# Altium PCB PCB1.PcbDoc (part 2 of 4)
Units mil, origin at the board's own origin, x right, y up, seen from the top; angles counter-clockwise.
Board outline 3904 x 3805 mil, 4 copper layers (Top Layer, Layer 2, Layer 3, Bottom Layer), stack 23.756 mil thick; 231 components, 342 nets, 1187 pads, 543 vias.
Unrouted connection lines stored in the file: 4.
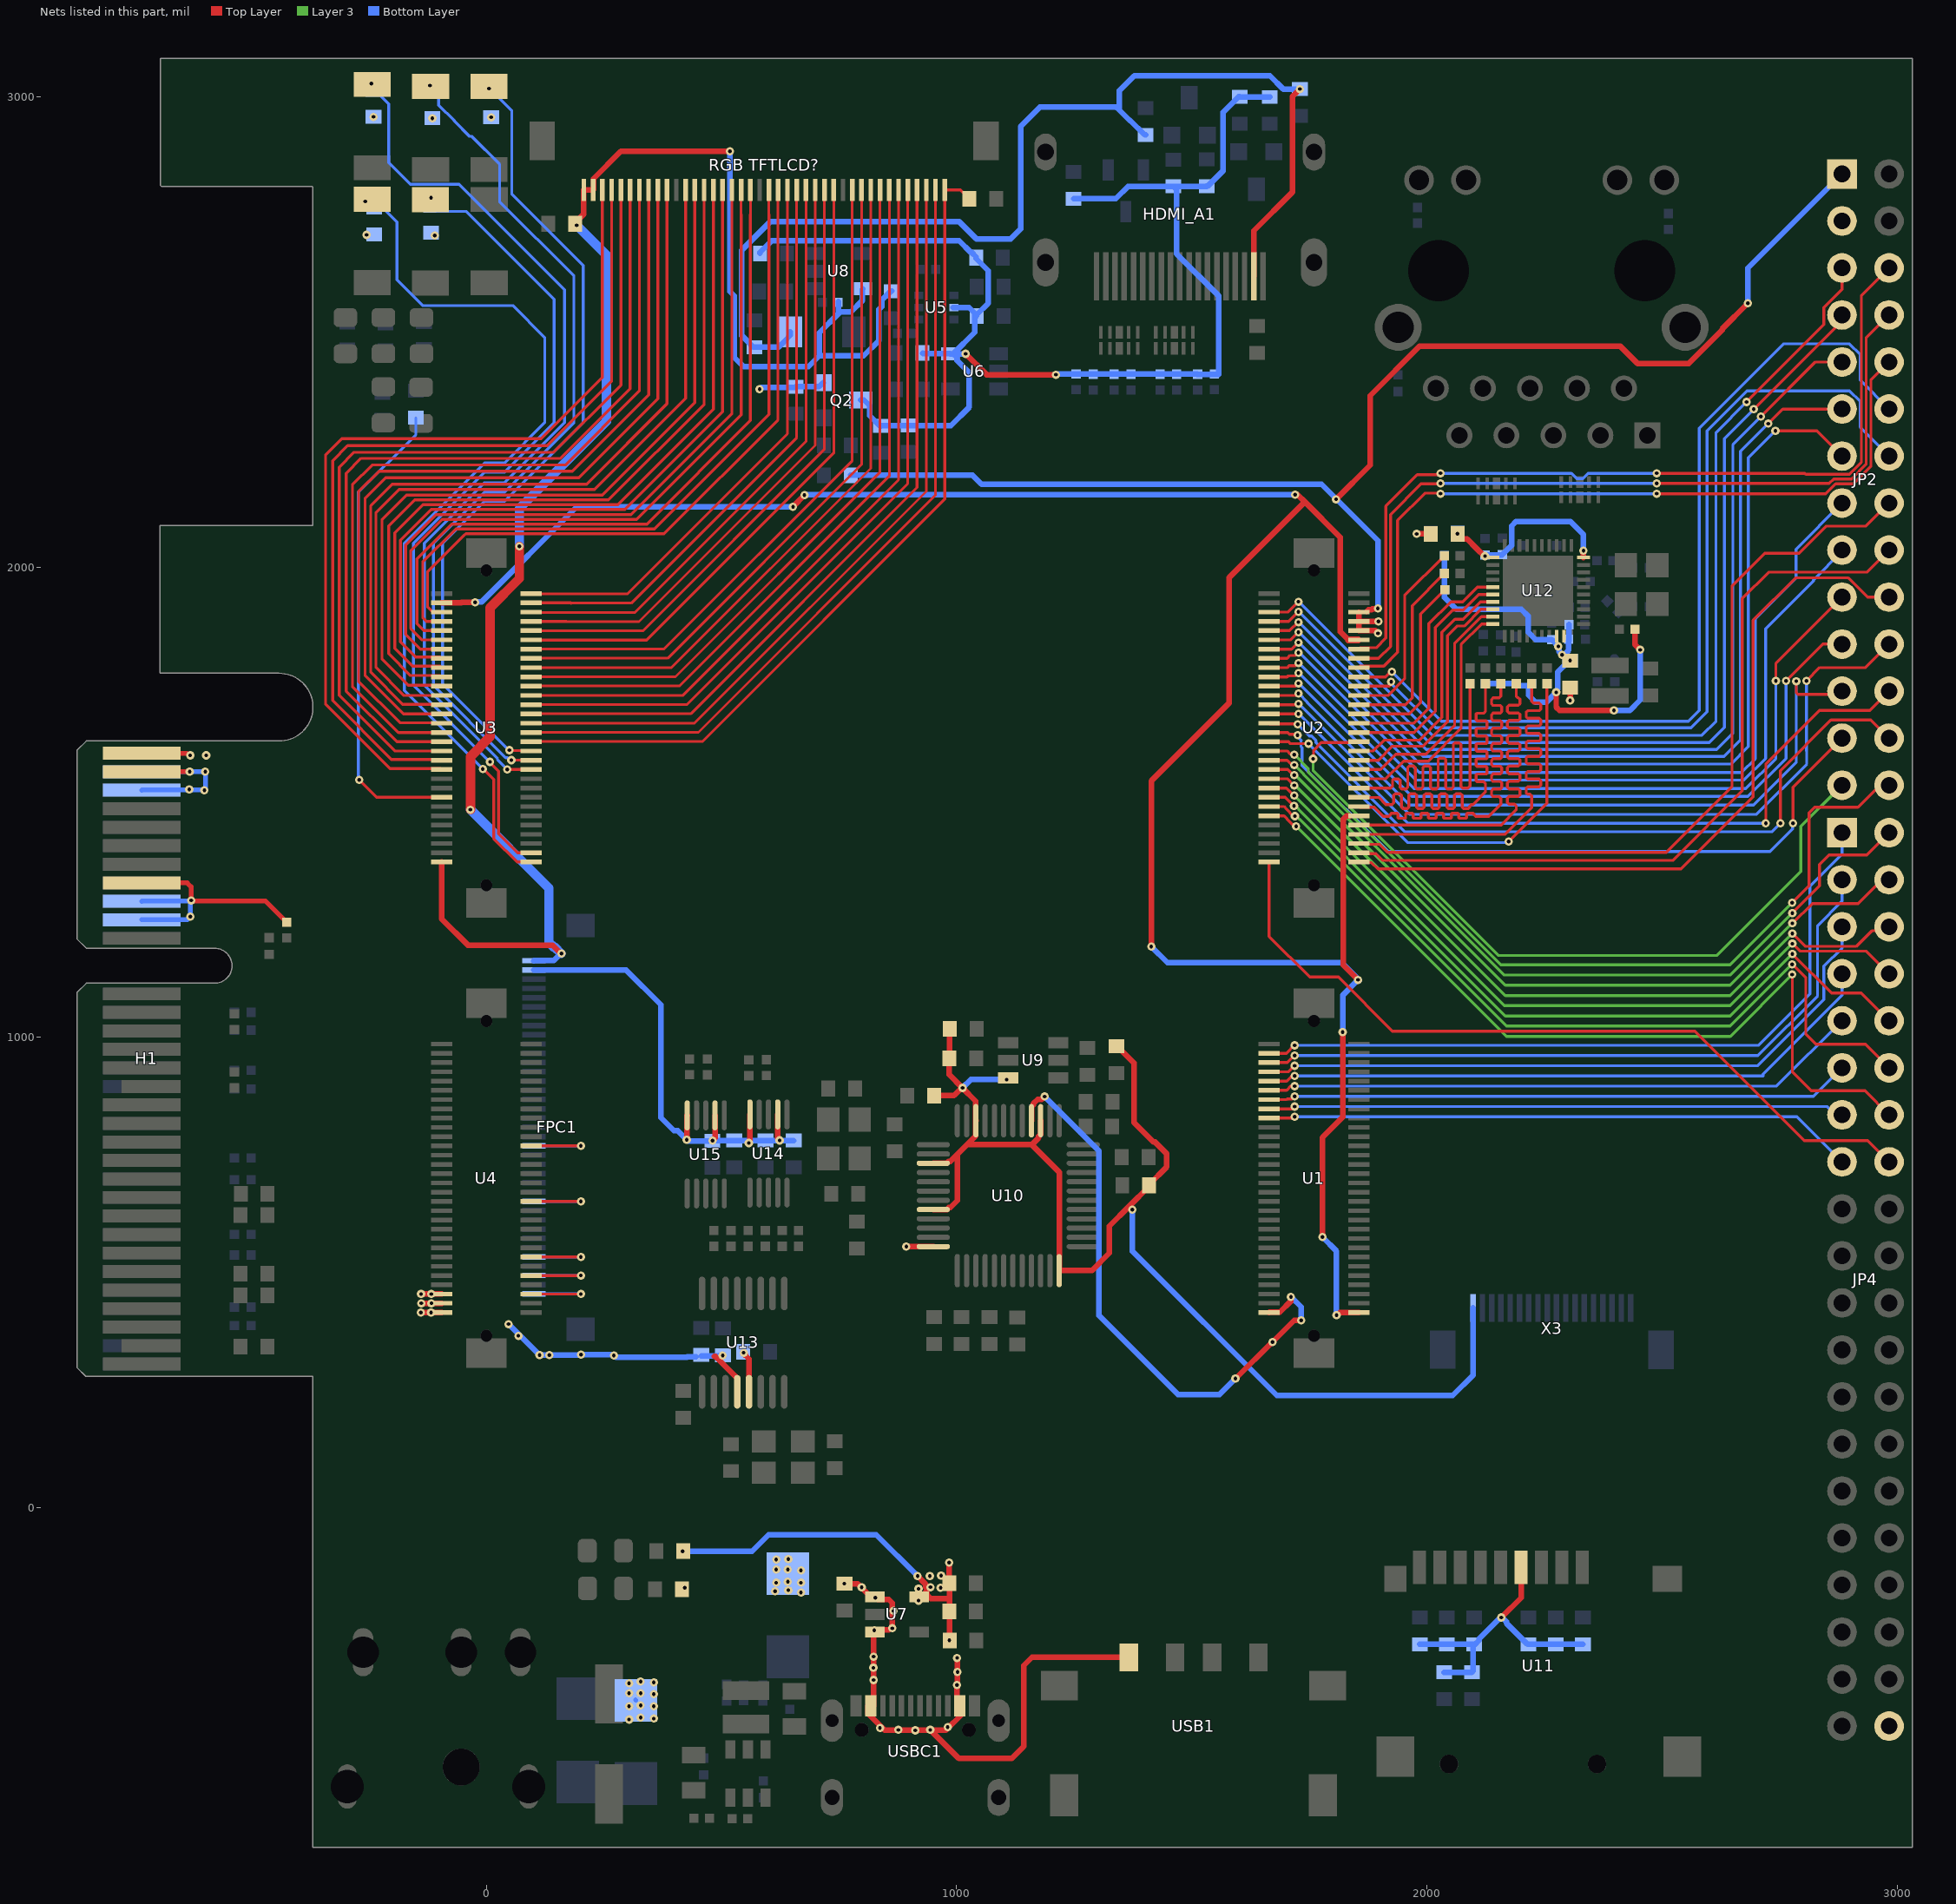
[diagram p4: the nets of this part, all layers, seen from the top]

## Via types
v1: diameter 17.7, hole 7.9, Top Layer to Bottom Layer, tented both sides, 543 vias

## Nets (pads, with @x,y where several pads share a name; then routed paths per layer and width w, separated by ;. In a path a pad name is that pad's centre, name@x,y a point inside that pad or via, vN(x,y) a via of type N, cw(c..) or ccw(c..) an arc to the next point about the centre after c; other vN are vias at no path point) (continued)
3V3_PCIE: H1.A9 H1.A10 H1.B8 R84.2 | length 605.5
  Top Layer w10: H1.B8@-733,1328.43 -636.43,1328.43 -628,1320 v1(-628,1291) -627,1290 -470.27,1290 R84.2@-425,1244.73
  Bottom Layer w10: H1.A10@-733,1249.68 -636.32,1249.68 v1(-629.47,1256.53) -629.47,1289.53 v1(-628,1291) ; H1.A9@-733,1289.06 -732.03,1290.03 v1@-628.97,1290.03
12V_PCIE: D6.1 H1.A2 H1.A3 H1.B1 H1.B2 | length 515.7
  Top Layer w10: H1.B2@-733,1564.65 -732.82,1564.82 -631.18,1564.82 v1(-631,1565) ; H1.B1@-733,1604.02 -636.56,1604.01 -632.08,1599.53 v1(-630,1599.53)
  Bottom Layer w10: H1.A3@-733,1525.28 -732.14,1526.14 -632.86,1526.14 v1(-632,1527) -631,1526 -598.86,1526 v1@-597.34,1527.52 ; H1.A2@-733,1564.65 -732.82,1564.82 -631.18,1564.82 v1(-631,1565) -602.86,1565 -597,1559.14 v1@-597,1527.86 ; D6.1@317,-409 D6.1@318,-410
  other v1: 303.38,-451 356,-449 328,-447 303.38,-423 356,-423 328,-421 356,-397 303.38,-395 328,-395 303.38,-374 356,-372 328,-370 -599.86,1525 -598,1565 -596,1599.53
+3.3: U1.2 U2.12 U2.50 U3.57 | length 5047
  Top Layer w12: U3.57@-95.46,1923.74 -53.9,1923.74 -52.64,1925 v1(-24,1925) ; v1(652,2128) 652,2128.51 v1(676.3,2152.81) ; v1(1414,1193) 1414,1545 1580,1711 1580,1978 1740.5,2138.5 ; v1(1720,2154) 1725,2154 1740.5,2138.5 ; v1(1778,575) 1778,786.86 1821,829.86 v1(1821,1011) ; v1(1808,409) 1809.54,409 1815.1,414.56 U1.2@1855.47,414.56 ; 1832.38,1843.92 1854.39,1843.92 U2.50@1855.47,1845 1854.39,1846.08 1832.38,1846.08 1816,1862.45 1816,2063 1740.5,2138.5 ; U2.12@1836.31,1471 1829.86,1471 1822.83,1463.97 1822.83,1153.17 v1(1854,1122)
  Bottom Layer w12: v1(-24,1925) -23.51,1925.49 -10.51,1925.49 192,2128 v1(652,2128) ; v1(676.3,2152.81) 677.49,2154 v1(1720,2154) ; v1(1414,1193) 1448.5,1158.5 1819.5,1158.5 1852.91,1125.09 1852.91,1124.63 1856.54,1121 v1@1856.63,1121 ; v1(1778,575) 1808,545 v1(1808,409) ; v1(1821,1011) 1821,1089 v1(1854,1122)
+3.3_AVDD_GMII: C46.2 C47.2 C48.2 FB7.1 U12.11 U12.40 | length 406.1
  Top Layer w12: v1(2065.34,2071) 2065.34,2068.92 2074.56,2059.7 2085.76,2059.7 2106.46,2039 2122.26,2023.2 v1(2123.8,2023.2) ; U12.40@2333.26,2020.3 v1(2333.26,2034.89)
  Bottom Layer w12: C48.2@2123.8,2025.43 v1(2123.8,2023.2) 2126.53,2025.93 2160.3,2025.93 C47.2@2160.8,2026.43 2180.64,2046.28 2180.64,2087.64 2190,2097 2305,2097 2333.26,2068.74 v1(2333.26,2034.89)
+3.3_board: C4.2 C5.2 C11.1 C15.2 C16.2 C21.2 C22.2 C25.1 C26.2 C27.2 C36.2 C37.2 FB6.2 FB7.2 FPC1.2 JP2.3 JP4.40 Q2.2 R14.2 R22.1 R24.1 R32.2 R36.2 R38.2 R41.2 R42.2 R43.2 R44.2 R45.2 R46.2 R49.2 R55.2 R56.2 R57.2 U7.5 U9.6 U10.3 U10.8 U10.12 U10.24 U10.39 U10.46 U11.4 U13.13 U14.7 U14.10 U15.7 U15.10 X3.18 | length 5838.9
  Top Layer w12: v1(417,-93) R49.2@418.54,-93 ; v1(426,782) 426.67,782.67 426.67,833.4 U15.10@427.16,833.89 ; v1(481.03,780.04) 486.21,785.23 U15.7@486.21,833.89 ; v1(547.07,329) 547.07,327.46 558.53,316 U13.13@558.53,246 ; v1(558,775) 560.47,777.47 U14.10@560.47,835.89 ; U14.7@619.53,835.89 619.53,784.54 v1(623.53,780.54) ; v1(893,555) 893.15,554.85 U10.12@950.43,554.85 ; v1(917,-146) 934,-163 934,-169.5 ; v1(944.5,-169.5) 934,-180 936.81,-182.81 936.81,-187.81 938.81,-187.81 944.87,-193.87 984.65,-193.87 ; U10.8@950.43,633.59 979.38,633.59 983.56,637.76 986.78,637.76 1001.61,652.6 1001.61,751.02 ; U10.3@950.43,732.02 979.38,732.02 983.55,736.18 986.78,736.18 1001.61,751.02 ; C4.2@952.54,876 994.68,876 1010.93,892.25 v1(1012.48,892.25) ; v1(984,-117) 984.07,-117.07 984.07,-160.79 984.65,-161.37 984.65,-193.87 ; v1(984.65,-282.37) 984.65,-193.87 ; R22.1@985.91,1018 985.19,1017.27 985.19,955.73 R24.1@984.46,955 984.46,920.27 v1(1012.48,892.25) ; U10.39@1178.78,822.57 1178.78,793.62 1174.6,789.44 1174.6,786.22 1159.77,771.39 ; R14.2@1340,980.54 1341.97,980.54 1377,945.51 1377,819 1419,777 1422.18,777 1447,752.18 1447,724.43 1409.54,686.97 R32.2@1409.54,685 1409.54,683.03 1366.84,640.33 ; v1(1373.93,633.24) 1366.84,640.33 ; v1(1978.43,2070.43) FB7.2@2008.71,2070.43 ; v1(2158.5,-234) 2200.72,-191.78 U11.4@2200.72,-127.32 ; v1(2304.8,1716.28) FB6.2@2304.8,1743.89 ; 1001.61,751.02 1021.98,771.39 ; v1(1012.48,892.25) 1040.49,864.23 1040.49,823.05 U10.46@1040.98,822.57 1040.49,822.08 1040.49,789.9 1021.98,771.39 ; 1021.98,771.39 1159.77,771.39 ; 1159.77,771.39 1218.15,713 U10.24@1218.15,503.67 1287.67,503.67 1325,541 1325,598.49 1366.84,640.33
  Bottom Layer w12: FPC1.2@101,1143.13 296.87,1143.13 371,1069 371,829.19 398.87,801.32 406.68,801.32 v1(426,782) 427.54,782 430.5,779.04 480.03,779.04 v1(481.03,780.04) 593.03,780.04 C37.2@593.53,780.54 v1(623.53,780.54) C36.2@653.53,780.54 ; v1(417,-93) 565,-93 600,-58 829,-58 v1(917,-146) v1@918,-147 ; C25.1@545.98,331 545.53,330.54 v1(547.07,329) ; v1(581,2378) 585,2382 656.46,2382 C11.1@658,2383.54 707.54,2383.54 Q2.2@716,2392 ; v1(1012.48,892.25) 1030.23,910 v1(1106.4,910) ; v1(1373.93,633.24) 1373.93,545.07 1681,238 2055,238 2098.68,281.68 X3.18@2098.68,424.61 ; R57.2@1985,-291.09 R36.2@2102.64,-291.09 ; C21.2@2037,-350.46 C22.2@2096,-350.46 2098.33,-348.12 2098.33,-295.39 R36.2@2102.64,-291.09 ; v1(2304.8,1716.28) v1@2306.28,1716.28 ; R46.2@2332,-291.09 R55.2@2274.17,-291.09 R56.2@2216.33,-291.09 2214.36,-291.09 2169.23,-245.95 2169.23,-242.76 2160.47,-234 v1(2158.5,-234) 2156.53,-234 2111.4,-279.13 2111.4,-282.32 R36.2@2102.64,-291.09
  other v1: 919,-198 919,-173 966,-171 943,-146 967,-145 -110,2705 -255,2706.46 -115,2954.46 10,2956.46 -240,2957.46
+3.3_DVDD_GMII: C43.1 C44.1 C45.1 FB6.1 R77.1 R79.1 R82.1 R96.2 R100.1 R103.2 R105.2 R106.2 R109.1 U12.28 U12.29 | length 1150.3
  Top Layer w12: v1(2275.22,1733.56) 2275.22,1702.03 2282.25,1695 v1(2398,1695) ; R82.1@2442.73,1868 2442.53,1867.8 2442.53,1835.47 v1(2454,1824)
  Bottom Layer w12: R100.1@2037.48,2024.43 R77.1@2037.48,1986.43 2037.48,1935.52 2063,1910 2201,1910 2216,1895 2216,1861 2231.57,1845.43 C45.1@2265.8,1845.43 2280.82,1830.41 2280.82,1820.41 v1(2287.8,1813.43) 2289.34,1813.43 2290.43,1814.52 2293.21,1814.52 2301.78,1823.1 2301.78,1842.59 2302.07,1842.88 2302.07,1877.17 R96.2@2302.34,1877.43 ; R106.2@2124.4,1751.97 R105.2@2157.2,1751.97 R103.2@2190,1751.97 2193.84,1748.13 2213.87,1748.13 2216.42,1745.58 2216.42,1727.4 2231.59,1712.22 2253.89,1712.22 v1(2275.22,1733.56) ; v1@2273.22,1735.56 2278.07,1740.41 2278.07,1776.21 2302.83,1800.98 v1(2304.8,1800.98) C43.1@2292.34,1813.43 ; v1(2398,1695) 2432,1695 2454,1717 v1(2454,1824)
  other v1: 2279.73,1831.3
+3.3_hdmi: C1.1 C2.2 C12.2 C13.2 Q2.3 R1.2 R2.2 R3.2 R4.2 R5.2 R6.2 R7.2 R8.2 R9.2 R10.2 R17.1 R18.1 R21.1 R27.1 R30.1 U5.5 U6.5 | length 2874
  Top Layer w12: v1(1019.4,2453.4) 1063.8,2409 v1(1211,2409)
  Bottom Layer w12: R18.1@581.79,2667 581.79,2668.97 606.82,2694 1005.46,2694 1030.72,2668.73 1032.69,2668.73 1041.46,2659.97 R10.2@1041.46,2658 1041.46,2656.03 1067.22,2630.27 1067.22,2560.73 1042.46,2535.97 C1.1@1042.46,2534 C1.1@1038.69,2530.23 ; Q2.3@796,2355 803,2355 815,2343 815,2322.03 837.03,2300 C12.2@839,2300 839.77,2300.77 987.77,2300.77 1027,2340 1027,2413.22 1000.82,2439.4 1000.82,2445.4 U6.5@992.82,2453.4 ; C2.2@927.54,2455 928.34,2454.2 986.02,2454.2 U6.5@986.82,2453.4 U6.5@992.82,2453.4 ; U5.5@992.4,2552 U5.5@994.4,2552 1026.43,2552 1038.69,2539.74 C1.1@1038.69,2530.23 ; v1(1019.4,2453.4) U6.5@992.82,2453.4 ; v1(1211,2409) 1212.09,2410.09 1254,2410.09 1290.43,2410.09 1334.86,2410.09 1371,2410.09 1379.29,2410.09 1423.71,2410.09 1433,2410.09 1468.14,2410.09 R2.2@1512.57,2410.09 ; R9.2@1248.69,2783.46 1338.84,2783.46 1364.84,2809.46 R21.1@1461,2809.46 ; R2.2@1512.57,2410.03 1548,2410.03 R1.2@1557,2410.03 ; R1.2@1555.09,2410.09 1557,2412 1557,2577 1468,2666 1468,2802.46 R21.1@1461,2809.46 ; R30.1@1666,2999.54 1665.73,2999.81 1602.27,2999.81 R27.1@1602,3000.09 1600.03,3000.09 1567,2967.06 1567,2843.03 1533.97,2810 R17.1@1532,2810 1531.73,2809.73 1461.27,2809.73 R21.1@1461,2809.46 ; U6.5@992.82,2453.4 1038.69,2499.27 C1.1@1038.69,2530.23
+5: "RGB TFTLCD?.1" "RGB TFTLCD?.2" C3.2 C10.2 C23.2 C24.2 C40.2 D7.2 FPC1.1 JP2.1 R16.2 R48.2 R83.1 U1.1 U2.52 U2.54 U2.56 U3.1 U4.1 U4.3 U4.5 U7.1 U7.3 U8.5 U10.40 U13.12 USB1.1 USBC1.A4 USBC1.A9 USBC1.B4 USBC1.B9 | length 10146.6
  Top Layer w12: v1(-139.44,414.56) U4.1@-95.47,414.56 ; v1(-138.93,453.93) U4.5@-95.47,453.93 ; v1(-138.76,434.24) U4.3@-95.47,434.24 ; U3.1@-95.47,1372.56 -95.47,1252.03 -39.44,1196 140.41,1196 158.32,1178.08 v1(159.87,1178.08) ; v1(192,2726.54) C40.2@188.54,2730 188.54,2731.97 207.13,2750.56 207.13,2802 226.82,2802 227.9,2803.08 227.9,2826.08 285.82,2884 v1(518,2884) ; v1@269.46,323 v1(271,323) ; 485.03,320.96 487.29,320.96 533.53,274.72 U13.12@533.53,246 ; C10.2@761.69,-161.78 762.03,-162.11 789.4,-162.11 817.35,-190.06 U7.1@826.2,-190.06 ; USBC1.A4@811.82,-421.92 811.82,-438.46 847.36,-474 v1(912.13,-474) 976.9,-474 1012.6,-438.3 USBC1.A9@1012.6,-421.76 ; USBC1.B9@823.63,-421.92 v1(823.63,-367) v1(823.63,-317.22) 823.63,-267.44 830.37,-260.7 855.97,-260.7 863,-253.67 863,-202.9 855.97,-195.87 832.26,-195.87 U7.1@826.45,-190.06 ; v1@945,-475 945.14,-474.86 945.86,-474.86 1005,-534 1117,-534 1143,-508 1143,-336 1160.43,-318.58 USB1.1@1366.2,-318.58 ; USBC1.B4@1000.79,-421.76 v1(1000.79,-377.48) 1001.4,-376.88 1001.4,-350.6 v1(1002,-350) 1001.5,-349.5 1001.5,-320.5 v1(1001,-320) ; U10.40@1159.09,822.57 1159.09,851.51 1163.27,855.69 1163.27,858.91 1172.36,868 1181,868 v1(1187,874) ; v1(1593,274) 1593.5,274 1671.5,352 v1(1672,352) 1718,398 v1(1733,398) ; U1.1@1664.53,414.56 1665.61,415.64 1687.63,415.64 1711,439.01 v1(1711,448) ; v1(1807,2144) 1879.5,2216.5 1879.5,2364.5 1985,2470 2411,2470 2448,2433 2557.34,2433 2628.09,2503.74 2628.09,2506.09 v1(2683,2561) ; U2.56@1855.47,1904.05 U2.54@1855.47,1884.37 ; U2.56@1872.11,1905.13 1875.79,1908.82 1882.25,1908.82 1884.31,1910.87 1894.87,1910.87 v1(1895.97,1911.97) ; v1(1896,1859) 1890.32,1864.68 U2.52@1855.47,1864.68 U2.54@1855.47,1884.37 ; v1(1896.91,1884.37) U2.54@1855.47,1884.37
  Top Layer w20: v1(-34,1484) -34,1597 8,1639 8,1913.51 70.18,1975.69 v1(70.18,2043.82)
  Bottom Layer w12: v1(47,390) v1(113.12,323.88) ; FPC1.1@101,1162.81 101.09,1162.91 143.15,1162.91 158.32,1178.08 v1@158.86,1178.08 ; v1@113,324 v1(134,324) 134.5,324.5 200.5,324.5 v1(201,325) 267.46,325 269.46,323 v1(271,323) 272.54,323 276.09,319.46 426.53,319.46 427.53,320.46 C23.2@446,320.46 ; C23.2@457,322.46 495.53,322.46 C24.2@496.03,322.96 ; v1(502.5,322.96) C24.2@503,323.46 ; v1(518,2884) 518,2586 527.14,2576.86 527.14,2445.86 547,2426 684.87,2426 708,2449.13 ; R83.1@749,2564.27 749,2539.27 ; R16.2@774.54,2195 1034,2195 1053,2176 1776,2176 1896,2056 v1(1895.97,1911.97) ; U8.5@800.77,2591.6 799.85,2590.68 799.85,2566.85 775.5,2542.5 752.23,2542.5 749,2539.27 ; C3.2@861.87,2586.54 859.91,2586.54 840.62,2567.26 840.62,2553.84 834.87,2548.09 834.87,2481.86 802.14,2449.13 708,2449.13 ; v1(1187,874) 1303,758 1303,408 1471,240 1559,240 v1(1593,274) ; v1(1711,448) 1732.61,426.39 1732.61,398.39 v1(1733,398) ; v1(2683,2561) 2683,2635.93 JP2.1@2883.07,2836 ; 708,2449.13 708,2498.27 749,2539.27
  Bottom Layer w14: 143.7,1191.41 145.54,1191.41 ; v1@158.86,1178.08 v1(159.87,1178.08)
  Bottom Layer w20: v1(-34,1484) 133,1317 133,1202.11 143.7,1191.41 ; v1(70.18,2043.82) 70,2044 70,2125 255,2310 255,2663.54 v1(192,2726.54) ; 145.54,1191.41 v1@158.86,1178.08
  other v1: 876,-473 944,-473 837,-469 981,-467 823,-341 825,-261 863,-257 866,-220 827,-192 669,-181 614,-178 642,-176 422,-171 798,-170 761,-162 616.38,-160 669,-160 641,-158 669,-134 616.38,-132 641,-132 616.38,-111 642,-110 68,365 -117.71,414.56 -117.03,434.24 -117.2,453.93
+5_hdmi: C8.2 F1.2 HDMI_A1.18 R20.1 R29.1 | length 2369.8
  Top Layer w12: HDMI_A1.18@1632.11,2618 1632.11,2715.11 1714,2797 1714,3000.54 v1(1730,3016.54)
  Bottom Layer w12: F1.2@646.37,2500 646.37,2492.5 621.33,2467.46 567.91,2467.46 543.14,2492.22 543.14,2673.99 604.15,2735 1005,2735 1042,2698 1115,2698 1136,2719 1136,2937 1177,2978 1340,2978 1346,2972 ; R20.1@1402,2919 1400.03,2919 1369.15,2949.88 1368.12,2949.88 1346,2972 ; v1(1730,3016.54) 1694.64,3016.54 1666.18,3045 1378,3045 1346,3013 1346,2978 1346,2972
B14_IO0: JP2.21 U2.39 | length 1551.6
  Top Layer w6.16: U2.39@1664.54,1746.57 1702.95,1746.57 1703.22,1746.85 1721.23,1746.85 v1(1727,1752.62) ; v1(2764.1,1758) 2842.1,1836 JP2.21@2883.07,1836
  Bottom Layer w6.16: v1(1727,1752.62) 1727.83,1752.62 1968.44,1512 2683.1,1512 2764.1,1593 v1(2764.1,1758)
B14_IO25: JP4.16 U2.1 | length 1675.2
  Top Layer w6.16: U2.1@1664.53,1372.56 1664.53,1214.47 1751,1128 1812,1128 1927,1013 2570,1013 2803,780 2938.07,780 JP4.16@2983.07,735
B14_N_L3: JP2.19 U2.41 | length 1610.6
  Top Layer w6.16: U2.41@1664.54,1766.26 1702.95,1766.26 1705.24,1768.55 1721.23,1768.55 v1(1727,1774.32) ; v1(2742.4,1758) 2742.4,1795.33 JP2.19@2883.07,1936
  Bottom Layer w6.16: v1(1727,1774.32) 1727.83,1774.32 1973.14,1529 2678.4,1529 2742.4,1593 v1(2742.4,1758)
B14_N_L4: JP2.15 U2.45 | length 1776.6
  Top Layer w6.16: U2.45@1664.54,1805.63 1702.95,1805.63 1709.27,1811.95 1721.23,1811.95 v1(1727,1817.72)
  Bottom Layer w6.16: v1(1727,1817.72) 1728.81,1817.72 1983.53,1563 2669,1563 2699,1593 2699,1891 2785,1977 2785,2037.93 JP2.15@2883.07,2136
B14_N_L5: R81.1 U2.36 | length 412.5
  Top Layer w6.16: U2.36@1855.47,1707.2 1954.2,1707.2 1969,1722 1969,1917.96 R81.1@2037.48,1986.43
B14_N_L6: U2.30 U12.16 | length 510.7
  Top Layer w6.16: U2.30@1855.47,1648.15 1973.15,1648.15 2018,1693 2018,1871.08 2054.92,1908 2077,1908 2110.56,1941.56 U12.16@2140.34,1941.56
B14_N_L7: JP2.23 U2.37 | length 1557.5
  Top Layer w6.16: U2.37@1664.54,1726.89 1722.97,1726.89 v1(1727,1730.92) ; v1(2785.8,1757.17) 2785.8,1732.81 2789.41,1729.2 2876.27,1729.2 JP2.23@2883.07,1736
  Bottom Layer w6.16: v1(1727,1730.92) 1727.83,1730.92 1745.94,1712.8 1745.94,1711.95 1963.89,1494 2695,1494 2785.8,1584.8 v1(2785.8,1757.17)
B14_N_L8: R80.1 U2.34 | length 402.4
  Top Layer w6.16: U2.34@1855.47,1687.52 1962.52,1687.52 1987,1712 1987,1899.96 R80.1@2038.48,1951.43
B14_N_L9: R62.1 U2.16 | length 996.3
  Top Layer w6.16: U2.16@1855.47,1510.35 1855.82,1510 1898,1510 1913,1495 1923,1495 1926.08,1495 1929.69,1498.61 1929.69,1514.6 1932.92,1517.83 1942.62,1517.83 1945.85,1514.6 1945.85,1489.37 1949.08,1486.14 1958.78,1486.14 1962.01,1489.37 1962.01,1514.6 1965.24,1517.83 1974.94,1517.83 1978.17,1514.6 1978.17,1489.37 1981.4,1486.14 1991.1,1486.14 1994.33,1489.37 1994.33,1514.6 1997.56,1517.83 2007.26,1517.83 2010.49,1514.6 2010.49,1489.37 2013.72,1486.14 2023.42,1486.14 2026.65,1489.37 2026.65,1514.6 2029.88,1517.83 2039.58,1517.83 2042.81,1514.6 2042.81,1489.37 2046.04,1486.14 2055.74,1486.14 2058.97,1489.37 2058.97,1514.6 2062.2,1517.83 2071.9,1517.83 2075.13,1514.6 2075.13,1489.37 2078.36,1486.14 2088.06,1486.14 2091.29,1489.37 2091.29,1491.39 2094.9,1495 2098,1495 2124.6,1521.6 2124.6,1536.88 2124.6,1539.97 2120.99,1543.57 2106.33,1543.57 2104.71,1545.19 2104.71,1558.12 2106.33,1559.73 2126.36,1559.73 2127.97,1561.35 2127.97,1574.28 2126.36,1575.89 2106.33,1575.89 2104.71,1577.51 2104.71,1590.44 2106.33,1592.05 2126.36,1592.05 2127.97,1593.67 2127.97,1606.6 2126.36,1608.21 2106.33,1608.21 2104.71,1609.83 2104.71,1622.76 2106.33,1624.37 2126.36,1624.37 2127.97,1625.99 2127.97,1638.92 2126.36,1640.53 2106.33,1640.53 2104.71,1642.15 2104.71,1655.08 2106.33,1656.69 2126.36,1656.69 2127.97,1658.31 2127.97,1671.24 2126.36,1672.85 2106.33,1672.85 2104.71,1674.47 2104.71,1687.4 2106.33,1689.01 2120.99,1689.01 2124.6,1692.62 2124.6,1709 R62.1@2124.6,1751.97
B14_N_L10: R59.1 U2.10 | length 929.3
  Top Layer w6.16: U2.10@1855.47,1451.3 2158.3,1451.3 2190.2,1483.2 2190.2,1489.21 2190.2,1492.29 2186.59,1495.89 2174.65,1495.89 2171.42,1499.13 2171.42,1508.82 2174.65,1512.05 2194.6,1512.05 2197.83,1515.29 2197.83,1524.98 2194.6,1528.21 2174.65,1528.21 2171.42,1531.45 2171.42,1541.14 2174.65,1544.37 2194.6,1544.37 2197.83,1547.61 2197.83,1557.3 2194.6,1560.53 2174.65,1560.53 2171.42,1563.77 2171.42,1573.46 2174.65,1576.69 2194.6,1576.69 2197.83,1579.93 2197.83,1589.62 2194.6,1592.85 2174.65,1592.85 2171.42,1596.09 2171.42,1605.78 2174.65,1609.01 2194.6,1609.01 2197.83,1612.25 2197.83,1621.94 2194.6,1625.17 2174.65,1625.17 2171.42,1628.41 2171.42,1638.1 2174.65,1641.33 2194.6,1641.33 2197.83,1644.57 2197.83,1654.26 2194.6,1657.49 2174.65,1657.49 2171.42,1660.73 2171.42,1670.42 2174.65,1673.65 2194.6,1673.65 2197.83,1676.89 2197.83,1686.58 2194.6,1689.81 2174.65,1689.81 2171.42,1693.05 2171.42,1702.74 2174.65,1705.97 2194.6,1705.97 2197.83,1709.21 2197.83,1718.9 2194.6,1722.13 2193.81,1722.13 2190.2,1725.74 2190.2,1732 R59.1@2190.2,1751.97
B14_N_L11: JP2.26 U2.31 | length 1596.8
  Top Layer w6.16: U2.31@1664.53,1667.83 1665.64,1666.72 1724.16,1666.72 v1(1725.27,1665.61) ; v1(2752,1455) 2752,1567 2859.58,1674.58 2944.49,1674.58 JP2.26@2983.07,1636
  Bottom Layer w6.16: v1(1725.27,1665.61) 1750.54,1640.34 1755.01,1640.34 1764.34,1631.01 1764.34,1626.54 1953.88,1437 2734,1437 v1(2752,1455)
B14_N_L12: JP2.25 U2.29 | length 1506.8
  Top Layer w6.16: U2.29@1664.54,1648.15 1704.09,1648.15 1707.84,1644.4 1722.86,1644.4 v1(1725.07,1642.19) ; v1(2779,1455) 2779,1531.93 JP2.25@2883.07,1636
  Bottom Layer w6.16: v1(1725.07,1642.19) 1725.07,1639.07 1732.81,1631.33 1732.48,1631.01 1732.48,1617.82 1734.91,1615.39 1734.91,1578.09 1918,1395 2730,1395 2777.87,1442.87 2777.87,1453.87 v1(2779,1455)
B14_N_L13: JP2.28 U2.25 | length 1760.5
  Top Layer w6.16: U2.25@1664.54,1608.78 1702.95,1608.78 1708.8,1602.92 1715.74,1602.92 v1(1717.95,1600.72) ; v1(2777,1286.2) 2813,1322.2 2813,1477 2825,1489 2917,1489 2953.13,1525.13 2972.2,1525.13 JP2.28@2983.07,1536
  Layer 3 w6.16: v1(1717.95,1600.72) 1718.78,1600.72 1747.99,1571.5 1747.99,1563.64 2157.73,1153.9 2644.7,1153.9 v1(2777,1286.2)
B14_N_L14: U2.24 U12.18 | length 525
  Top Layer w6.16: U2.24@1855.47,1589.09 1897,1589.09 1926.91,1619 1992,1619 2044,1671 2044,1854 2064.53,1874.53 2079.53,1874.53 2115.06,1910.06 U12.18@2140.34,1910.06
B14_N_L15: JP4.9 U1.49 | length 1279.8
  Top Layer w6.16: U1.49@1664.54,887 1701.91,887 1710.97,896.06 v1(1719,896.06)
  Bottom Layer w6.16: v1(1719,896.06) 2744.13,896.06 JP4.9@2883.07,1035
B14_N_L16: JP4.6 U2.19 | length 1592.8
  Top Layer w6.16: U2.19@1664.53,1549.72 1703.01,1549.72 1717.12,1535.62 v1(1717.95,1535.62) ; v1(2777.41,1220.69) 2778.24,1220.69 2805.77,1193.16 2913.16,1193.16 2946.39,1226.39 2974.46,1226.39 JP4.6@2983.07,1235
  Layer 3 w6.16: v1(1717.95,1535.62) 1720.36,1535.62 2167.18,1088.8 2644.7,1088.8 2776.59,1220.69 v1(2777.41,1220.69)
B14_N_L17: JP4.15 U1.43 | length 1259.5
  Top Layer w6.16: U1.43@1664.54,827.94 1715.98,827.94 v1(1719,830.96)
  Bottom Layer w6.16: v1(1719,830.96) 2787.11,830.96 JP4.15@2883.07,735
B14_N_L18: U2.20 U12.20 | length 525.4
  Top Layer w6.16: U2.20@1855.47,1549.72 1913,1549.72 1950.28,1587 2003,1587 2073,1657 2073,1835 2116.57,1878.57 U12.20@2140.34,1878.57
B14_N_L19: JP4.14 U2.11 | length 1812
  Top Layer w6.16: U2.11@1664.53,1470.98 1696.41,1470.98 1703.53,1463.86 1703.53,1463.59 1716.49,1450.62 1719.92,1450.62 v1(1722.13,1448.42) ; v1(2777,1133.47) 2777.41,1133.06 2777.41,926.59 2817.77,886.23 2931.84,886.23 JP4.14@2983.07,835
  Layer 3 w6.16: v1(1722.13,1448.42) 1722.89,1448.42 2169.31,1002 2645.53,1002 v1(2777,1133.47)
B14_N_L20: U2.26 U12.17 | length 522.2
  Top Layer w6.16: U2.26@1855.47,1608.78 1886,1608.78 1909,1631.78 1983.78,1631.78 2032,1680 2032,1861 2060,1889 2077,1889 2113.81,1925.81 U12.17@2140.34,1925.81
B14_N_L21: JP2.18 U2.4 | length 1647.3
  Top Layer w6.16: U2.4@1855.47,1392.24 1857.31,1390.4 1891.6,1390.4 1906,1376 2523,1376 2671,1524 2671,1933 2727,1989 2936.07,1989 JP2.18@2983.07,2036
B14_N_L22: JP4.8 U2.17 | length 1591.4
  Top Layer w6.16: U2.17@1664.53,1530.04 1701,1530.04 1717.12,1513.92 v1(1717.95,1513.92) ; v1(2777.41,1198.99) 2778.24,1198.99 2794.23,1183 2935.07,1183 JP4.8@2983.07,1135
  Layer 3 w6.16: v1(1717.95,1513.92) 2164.77,1067.1 2644.7,1067.1 2776.59,1198.99 v1(2777.41,1198.99)
B14_N_L23: JP4.5 U1.53 | length 1414.7
  Top Layer w6.16: U1.53@1664.54,926.37 1705.08,926.37 1718.17,939.46 v1(1719,939.46)
  Bottom Layer w6.16: v1(1719,939.46) 2704.16,939.46 2844.49,1079.79 2844.49,1150.98 2883.07,1189.55 JP4.5@2883.07,1235
B14_N_L24: JP4.1 U1.57 | length 1574.6
  Top Layer w6.16: U1.57@1664.54,965.74 1701.91,965.74 1701.91,966.6 1718.17,982.86 v1(1719,982.86)
  Bottom Layer w6.16: v1(1719,982.86) 2706.03,982.86 2815,1091.84 2815,1321.48 2883.07,1389.55 JP4.1@2883.07,1435
B14_P_L3: JP2.17 U2.43 | length 1692.8
  Top Layer w6.16: U2.43@1664.54,1785.94 1702.95,1785.94 1707.25,1790.25 1721.23,1790.25 v1(1727,1796.02)
  Bottom Layer w6.16: v1(1727,1796.02) 1727.83,1796.02 1976.84,1547 2674.7,1547 2720.7,1593 2720.7,1868.7 2822,1970 2822,1972.46 2883.07,2033.54 JP2.17@2883.07,2036
B14_P_L4: JP2.13 U2.47 | length 2006.8
  Top Layer w6.16: U2.47@1664.54,1825.31 1712.07,1825.31 1726.17,1839.42 v1(1727,1839.42) ; v1(2741.38,2289.62) 2829.45,2289.62 JP2.13@2883.07,2236
  Bottom Layer w6.16: v1(1727,1839.42) 1727.83,1839.42 1986.24,1581 2646.75,1581 2684,1618.25 2684,2232.25 v1(2741.38,2289.62)
B14_P_L5: R98.1 U2.38 | length 409
  Top Layer w6.16: U2.38@1855.47,1726.89 1917.89,1726.89 1953,1762 1953,1939.73 R98.1@2037.27,2024
B14_P_L7: JP2.22 U2.35 | length 1670.9
  Top Layer w6.16: U2.35@1664.54,1707.2 1724.98,1707.2 v1(1727,1709.22) ; v1(2807.5,1758) 2835.5,1786 2933.07,1786 JP2.22@2983.07,1836
  Bottom Layer w6.16: v1(1727,1709.22) 1727.83,1709.22 1963.04,1474 2701,1474 2808,1581 2808,1609 ; 2807.5,1609 v1(2807.5,1758)
B14_P_L8: U2.32 U12.15 | length 510.2
  Top Layer w6.16: U2.32@1855.47,1667.83 1972.83,1667.83 2004.48,1699.48 2004.48,1879.48 2051,1926 2076.21,1926 2107.51,1957.31 U12.15@2140.34,1957.31
B14_P_L9: R61.1 U2.14 | length 916.4
  Top Layer w6.16: U2.14@1855.47,1490.67 1857.14,1489 1888,1489 1907,1470 1916,1470 1919.08,1470 1922.69,1473.61 1922.69,1474.37 1924.3,1475.98 1937.23,1475.98 1938.85,1474.37 1938.85,1467.16 1940.46,1465.54 1953.39,1465.54 1955.01,1467.16 1955.01,1474.37 1956.62,1475.98 1969.55,1475.98 1971.17,1474.37 1971.17,1467.16 1972.78,1465.54 1985.71,1465.54 1987.33,1467.16 1987.33,1474.37 1988.94,1475.98 2001.87,1475.98 2003.49,1474.37 2003.49,1467.16 2005.1,1465.54 2018.03,1465.54 2019.65,1467.16 2019.65,1474.37 2021.26,1475.98 2034.19,1475.98 2035.81,1474.37 2035.81,1467.16 2037.42,1465.54 2050.35,1465.54 2051.97,1467.16 2051.97,1474.37 2053.58,1475.98 2066.51,1475.98 2068.13,1474.37 2068.13,1467.16 2069.74,1465.54 2082.67,1465.54 2084.29,1467.16 2084.29,1474.37 2085.9,1475.98 2098.83,1475.98 2100.45,1474.37 2100.45,1473.61 2104.06,1470 2132,1470 2141,1479 2157.4,1495.4 2157.4,1505 2157.4,1508.08 2153.79,1511.69 2140.97,1511.69 2137.74,1514.92 2137.74,1524.62 2140.97,1527.85 2156.31,1527.85 2159.54,1531.08 2159.54,1540.78 2156.31,1544.01 2140.97,1544.01 2137.74,1547.24 2137.74,1556.94 2140.97,1560.17 2156.31,1560.17 2159.54,1563.4 2159.54,1573.1 2156.31,1576.33 2140.97,1576.33 2137.74,1579.56 2137.74,1589.26 2140.97,1592.49 2156.31,1592.49 2159.54,1595.72 2159.54,1605.42 2156.31,1608.65 2140.97,1608.65 2137.74,1611.88 2137.74,1621.58 2140.97,1624.81 2156.31,1624.81 2159.54,1628.04 2159.54,1637.74 2156.31,1640.97 2140.97,1640.97 2137.74,1644.2 2137.74,1653.9 2140.97,1657.13 2156.31,1657.13 2159.54,1660.36 2159.54,1670.06 2156.31,1673.29 2140.97,1673.29 2137.74,1676.52 2137.74,1686.22 2140.97,1689.45 2156.31,1689.45 2159.54,1692.68 2159.54,1702.38 2156.31,1705.61 2140.97,1705.61 2137.74,1708.84 2137.74,1718.54 2140.97,1721.77 2153.79,1721.77 2157.4,1725.38 2157.4,1732.98 R61.1@2157.4,1751.97
B14_P_L10: R70.1 U2.8 | length 976.8
  Top Layer w6.16: U2.8@1855.47,1431.61 2166.61,1431.61 2223,1488 2223,1510 2223,1513.08 2219.39,1516.69 2214.69,1516.69 2211.46,1519.92 2211.46,1529.62 2214.69,1532.85 2239.2,1532.85 2242.43,1536.08 2242.43,1545.78 2239.2,1549.01 2214.69,1549.01 2211.46,1552.24 2211.46,1561.94 2214.69,1565.17 2239.2,1565.17 2242.43,1568.4 2242.43,1578.1 2239.2,1581.33 2214.69,1581.33 2211.46,1584.56 2211.46,1594.26 2214.69,1597.49 2239.2,1597.49 2242.43,1600.72 2242.43,1610.42 2239.2,1613.65 2214.69,1613.65 2211.46,1616.88 2211.46,1626.58 2214.69,1629.81 2239.2,1629.81 2242.43,1633.04 2242.43,1642.74 2239.2,1645.97 2214.69,1645.97 2211.46,1649.2 2211.46,1658.9 2214.69,1662.13 2239.2,1662.13 2242.43,1665.36 2242.43,1675.06 2239.2,1678.29 2214.69,1678.29 2211.46,1681.52 2211.46,1691.22 2214.69,1694.45 2239.2,1694.45 2242.43,1697.68 2242.43,1707.38 2239.2,1710.61 2226.61,1710.61 2223,1714.22 2223,1718 R70.1@2223,1751.97
B14_P_L11: JP2.24 U2.33 | length 1605
  Top Layer w6.16: U2.33@1664.54,1687.52 v1(1727,1687.52) ; v1(2721,1455) 2721,1581 2835,1695 2942.07,1695 JP2.24@2983.07,1736
  Bottom Layer w6.16: v1(1727,1687.52) 1727.83,1687.52 1960.34,1455 v1(2721,1455)
B14_P_L12: R68.1 U2.27 | length 969
  Top Layer w6.16: U2.27@1664.54,1628.46 1705.81,1628.46 1709.86,1624.41 v1(1748.41,1624.41) ; v1(2174,1416) 2255.33,1497.33 2255.33,1751.5 R68.1@2255.8,1751.97
  Bottom Layer w6.16: v1(1748.41,1624.41) 1958.83,1414 2172,1414 v1(2174,1416)
B14_P_L13: JP4.2 U2.23 | length 1660.1
  Top Layer w6.16: U2.23@1664.54,1589.09 1702.95,1589.09 1710.82,1581.22 1715.74,1581.22 v1(1717.95,1579.02) ; v1(2777.41,1264.09) 2835.16,1321.83 2835.16,1367.16 2855.55,1387.55 2935.62,1387.55 JP4.2@2983.07,1435
  Layer 3 w6.16: v1(1717.95,1579.02) 1718.78,1579.02 1737.83,1559.96 1737.83,1559.43 2165.06,1132.2 2644.7,1132.2 2776.59,1264.09 v1(2777.41,1264.09)
B14_P_L14: U2.22 U12.19 | length 521.5
  Top Layer w6.16: U2.22@1855.47,1569.41 1901.41,1569.41 1934,1602 1998.16,1602 2059.16,1663 2059.16,1837.16 2116.31,1894.31 U12.19@2140.34,1894.31
B14_P_L15: JP4.11 U1.47 | length 1246.6
  Top Layer w6.16: U1.47@1664.54,867.31 1701.91,867.31 1703.19,868.59 1713.23,868.59 v1(1719,874.36)
  Bottom Layer w6.16: v1(1719,874.36) 2822.43,874.36 JP4.11@2883.07,935
B14_P_L16: JP4.4 U2.21 | length 1601.6
  Top Layer w6.16: U2.21@1664.53,1569.4 1704.45,1569.4 1716.54,1557.32 v1(1717.95,1557.32) ; v1(2777.41,1242.39) 2778.24,1242.39 2820.22,1284.36 2917.36,1284.36 2968,1335 JP4.4@2983.07,1335
  Layer 3 w6.16: v1(1717.95,1557.32) 1720.36,1557.32 2167.18,1110.5 2644.7,1110.5 2776.59,1242.39 v1(2777.41,1242.39)
B14_P_L17: JP4.13 U1.45 | length 1227.9
  Top Layer w6.16: U1.45@1664.54,847.63 1713.96,847.63 v1(1719,852.66)
  Bottom Layer w6.16: v1(1719,852.66) 2851.05,852.66 2868.71,835 JP4.13@2883.07,835
B14_P_L18: R64.1 U2.18 | length 978.7
  Top Layer w6.16: U2.18@1855.47,1530.04 U2.18@1855.47,1530.04 1920.35,1530 1923.43,1530 1927.04,1533.61 1927.04,1546.16 1930.27,1549.4 1939.97,1549.4 1943.2,1546.16 1943.2,1531.22 1946.43,1527.99 1956.13,1527.99 1959.36,1531.22 1959.36,1573.61 1962.59,1576.84 1972.29,1576.84 1975.52,1573.61 1975.52,1531.22 1978.75,1527.99 1988.45,1527.99 1991.68,1531.22 1991.68,1573.61 1994.91,1576.84 2004.61,1576.84 2007.84,1573.61 2007.84,1531.22 2011.07,1527.99 2020.77,1527.99 2024,1531.22 2024,1590.4 2027.23,1593.63 2036.93,1593.63 2040.16,1590.4 2040.16,1531.22 2043.39,1527.99 2053.09,1527.99 2056.32,1531.22 2056.32,1622.72 2059.55,1625.95 2069.25,1625.95 2072.48,1622.72 2072.48,1533.61 2076.09,1530 2081.11,1530 2087.15,1530 2091.8,1534.65 R64.1@2091.8,1751.97
B14_P_L19: JP4.12 U2.13 | length 1728.1
  Top Layer w6.16: U2.13@1664.53,1490.67 1696.41,1490.67 1701.61,1485.47 1701.61,1485.2 1716.62,1470.19 v1(1719.46,1470.19) ; v1(2777,1155.17) 2777.83,1155.17 2806,1127 2806,1007 2828,985 2933.07,985 JP4.12@2983.07,935
  Layer 3 w6.16: v1(1719.46,1470.19) 1722.58,1470.19 1728.42,1464.35 1728.72,1464.35 2169.37,1023.7 2644.7,1023.7 2776.17,1155.17 v1(2777,1155.17)
B14_P_L20: JP2.27 U2.28 | length 1635.1
  Top Layer w6.16: v1(1758.15,1592.15) 1759.24,1593.24 1759.24,1610.24 1775.62,1626.62 1853.63,1626.62 U2.28@1855.47,1628.46
  Layer 3 w6.16: v1(1758.15,1592.15) 1758.15,1567.85 2152,1174 2617,1174 2795.33,1352.33 2795.33,1448.26 JP2.27@2879,1531.93
B14_P_L21: JP2.16 U2.6 | length 1692.7
  Top Layer w6.16: U2.6@1855.47,1411.93 1873.19,1411.93 1875.03,1410.09 1899.91,1410.09 1917,1393 2509,1393 2649,1533 2649,1959 2719,2029 2792,2029 2850,2087 2934.07,2087 JP2.16@2983.07,2136
B14_P_L22: JP4.10 U2.15 | length 1624.7
  Top Layer w6.16: U2.15@1664.53,1510.35 1698.98,1510.35 v1(1717.54,1491.8) ; v1(2777.41,1177.29) 2860.7,1094 2924.07,1094 JP4.10@2983.07,1035
  Layer 3 w6.16: v1(1717.54,1491.8) 1720.37,1491.8 1733.72,1478.45 1734.12,1478.45 2167.18,1045.4 2644.7,1045.4 2776.59,1177.29 v1(2777.41,1177.29)
B14_P_L23: JP4.7 U1.51 | length 1341.9
  Top Layer w6.16: U1.51@1664.54,906.68 1701.91,906.68 1712.99,917.76 v1(1719,917.76)
  Bottom Layer w6.16: v1(1719,917.76) 2715,917.76 2715,921.48 2883.07,1089.55 JP4.7@2883.07,1135
B14_P_L24: JP4.3 U1.55 | length 1493.8
  Top Layer w6.16: U1.55@1664.54,946.05 1703.06,946.05 1718.17,961.16 v1(1719,961.16)
  Bottom Layer w6.16: v1(1719,961.16) 2704.16,961.16 2831,1088 2831,1237.48 2883.07,1289.55 JP4.3@2883.07,1335
B15_IO0: "RGB TFTLCD?.10" U3.35 | length 1708.3
  Top Layer w6.16: U3.35@-95.46,1707.2 -96.25,1707.99 -177.99,1707.99 -246,1776 -246,2130.48 -200.48,2176 213,2176 384.3,2347.3 384.3,2802
B15_IO25: JP2.20 U2.2 | length 1627.1
  Top Layer w6.16: U2.2@1855.47,1372.56 1856.64,1371.39 1882.61,1371.39 1896,1358 2541,1358 2694,1511 2694,1886.63 2784.37,1977 2896.63,1977 2937.63,1936 JP2.20@2983.07,1936
B15_N_L1: "RGB TFTLCD?.3" U3.21 | length 1890.3
  Top Layer w6.16: U3.21@-95.47,1569.4 -97.31,1571.25 -205.25,1571.25 -342,1708 -342,2239 -307.76,2273.24 116.56,2273.24 246.5,2403.18 246.5,2802
B15_N_L2: "RGB TFTLCD?.7" U3.29 | length 1779.6
  Top Layer w6.16: U3.29@-95.46,1648.15 -187.15,1648.15 -285,1746 -285,2175 -243,2217 168,2217 325.24,2374.24 325.24,2802
B15_N_L3: R42.1 SW2.2 U3.24 | length 1819.2
  Top Layer w6.16: v1(53.02,1589.34) 53.14,1589.21 95.35,1589.21 U3.24@95.47,1589.09
  Bottom Layer w6.16: R42.1@-115,3017 -101.35,3003.35 -101.35,2982.31 -68.67,2949.64 -68.67,2948.67 -36,2916 -31,2916 28,2857 28,2777 186,2619 186,2306.69 39,2159.69 -3.6,2159.69 -112.68,2050.6 -112.68,1748.16 41.02,1594.45 44.78,1594.45 49.89,1589.34 v1(53.02,1589.34)
  other v1: -120.3,3023.99
B15_N_L4: "RGB TFTLCD?.36" U3.36 | length 1610.5
  Top Layer w5.61: U3.36@104.91,1707.57 426.48,1707.57 896.11,2177.21 896.11,2802
B15_N_L5: "RGB TFTLCD?.6" U3.27 | length 1811.6
  Top Layer w6.16: U3.27@-95.46,1628.46 -190.46,1628.46 -298,1736 -298,2199.48 -266.48,2231 157.84,2231 305.56,2378.72 305.56,2802
B15_N_L6: "RGB TFTLCD?.34" U3.40 | length 1545.3
  Top Layer w5.61: U3.40@104.91,1746.95 410.17,1746.95 856.74,2193.51 856.74,2802
B15_N_L7: "RGB TFTLCD?.17" U3.47 | length 1557.7
  Top Layer w5.61: 522.09,2749.97 522.09,2802
  Top Layer w6.16: U3.47@-103,1825.31 -140.31,1825.31 -172,1857 -172,2047 -107.37,2111.63 307.63,2111.63 522.09,2326.09 522.09,2749.97
B15_N_L8: "RGB TFTLCD?.35" U3.38 | length 1577.9
  Top Layer w5.61: U3.38@104.91,1727.26 418.33,1727.26 876.43,2185.36 876.43,2802
B15_N_L9: "RGB TFTLCD?.22" U3.55 | length 1476.7
  Top Layer w5.61: 620,2749.97 620,2801.48 620.52,2802
  Top Layer w6.16: U3.55@-95.46,1904.05 -113.18,1904.05 -120.66,1911.53 -120.83,1911.53 -125.18,1915.88 -125.18,1989.68 -46.24,2068.62 -45.9,2068.62 -43.53,2070.99 377.99,2070.99 620,2313 620,2749.97
B15_N_L10: JP2.6 U2.48 | length 1846.9
  Top Layer w6.16: U2.48@1855.47,1825.31 1858.55,1828.39 1892.39,1828.39 1912.84,1848.84 1912.84,2129.53 1979.68,2196.37 2027,2196.37 2029,2198.37 v1(2029,2199.4) ; v1(2489,2199.4) 2804,2199.4 2805.98,2197.42 2899.05,2197.42 2924.17,2222.55 2924.17,2577.1 JP2.6@2983.07,2636
  Bottom Layer w6.16: v1(2029,2199.4) 2307.56,2199.4 2318.65,2188.31 2331.84,2188.31 2342.93,2199.4 v1(2489,2199.4)
B15_N_L11: "RGB TFTLCD?.18" U3.49 | length 1542.1
  Top Layer w5.61: 541.78,2749.97 541.78,2802
  Top Layer w6.16: U3.49@-95.46,1845 -137,1845 -161,1869 -161,2035 -94.53,2101.47 319.47,2101.47 541.78,2323.78 541.78,2749.97
B15_N_L12: "RGB TFTLCD?.33" U3.42 | length 1512.7
  Top Layer w5.61: U3.42@104.91,1766.63 402.02,1766.63 837.06,2201.67 837.06,2802
B15_N_L13: "RGB TFTLCD?.25" U3.56 | length 1269.9
  Top Layer w5.61: U3.56@95.47,1904.05 95.89,1903.63 316.31,1903.63 679.57,2266.9 679.57,2802
B15_N_L14: "RGB TFTLCD?.23" U3.60 | length 1204.6
  Top Layer w5.61: U3.60@95.47,1943.42 95.89,1943 300,1943 640.2,2283.2 640.2,2802
B15_N_L15: JP2.5 U2.55 | length 2164.8
  Top Layer w6.16: U2.55@1664.54,1904.05 1704.01,1904.05 1726.17,1926.22 v1(1727,1926.22) ; v1(2680,2351) 2844.49,2515.49 2844.49,2551.98 2883.07,2590.55 JP2.5@2883.07,2636
  Bottom Layer w6.16: v1(1727,1926.22) 1727.83,1926.22 2012.04,1642 2585,1642 2615,1672 2615,2286 v1(2680,2351)
B15_N_L16: JP2.12 U2.42 | length 1949.6
  Top Layer w6.16: U2.42@1855.47,1766.26 1912.13,1766.26 1923.27,1777.39 v1(1926.03,1777.39)
  Bottom Layer w6.16: v1(1926.03,1777.39) 1926.03,1776.97 2031,1672 2556.31,1672 2579.48,1695.17 2579.48,2295.48 2758.58,2474.58 2899.05,2474.58 2921.65,2451.98 2921.65,2397.42 JP2.12@2983.07,2336
B15_N_L17: JP2.8 U2.46 | length 1752.1
  Top Layer w6.16: U2.46@1855.47,1805.63 1897.47,1805.63 1923,1831.16 1923,2111.86 1987.83,2176.69 2027.98,2176.69 v1(2029,2177.7) ; v1(2489,2177.7) 2855.85,2177.7 2865.41,2187.26 2903.26,2187.26 2934.33,2218.34 2934.33,2487.26 JP2.8@2983.07,2536
  Bottom Layer w6.16: v1(2029,2177.7) v1(2489,2177.7)
B15_N_L18: JP2.9 U2.51 | length 2039.2
  Top Layer w6.16: U2.51@1664.54,1864.68 1708.04,1864.68 1726.17,1882.82 v1(1727,1882.82) ; v1(2710.69,2320.31) 2826.38,2436 JP2.9@2883.07,2436
  Bottom Layer w6.16: v1(1727,1882.82) 1727.83,1882.82 1998.64,1612 2616.38,1612 2651,1646.62 2651,2260.62 v1(2710.69,2320.31)
B15_N_L19: "RGB TFTLCD?.39" U3.30 | length 1708.4
  Top Layer w5.61: U3.30@104.91,1648.52 450.94,1648.52 955.16,2152.74 955.16,2802
B15_N_L20: R44.1 SW4.2 U3.4 | length 1795.8
  Top Layer w6.16: v1(7.63,1585.63) 7.63,1584.21 26.07,1565.77 26.07,1432.41 66.24,1392.24 U3.4@95.47,1392.24
  Bottom Layer w6.16: R44.1@-119,2774 -119,2771.06 -104.35,2756.4 -43.4,2756.4 143.68,2569.31 143.68,2306.69 39,2202 -3.6,2202 -155,2050.6 -155,1748.26 v1(7.63,1585.63)
  other v1: -117.96,2785.53
B15_N_L21: "RGB TFTLCD?.12" U3.37 | length 1696.5
  Top Layer w6.16: U3.37@-95.46,1726.89 -175.89,1726.89 -235,1786 -235,2116 -186,2165 230,2165 423.67,2358.67 423.67,2802
B15_N_L22: "RGB TFTLCD?.37" U3.34 | length 1643.1
  Top Layer w5.61: U3.34@104.91,1687.89 434.63,1687.89 915.8,2169.05 915.8,2802
B15_N_L23: "RGB TFTLCD?.13" U3.39 | length 1668.3
  Top Layer w6.16: U3.39@-95.46,1746.57 -97.31,1748.41 -166.41,1748.41 -222,1804 -222,2101.16 -170.32,2152.84 246.84,2152.84 443.35,2349.35 443.35,2777.93 443.35,2802
B15_N_L24: "RGB TFTLCD?.30" U3.48 | length 1424.4
  Top Layer w5.61: U3.48@95.47,1825.31 377.18,1825.31 778,2226.13 778,2802
B15_P_L1: "RGB TFTLCD?.4" U3.23 | length 1864.4
  Top Layer w6.16: U3.23@-95.46,1589.09 -97.3,1590.93 -201.93,1590.93 -327,1716 -327,2226.16 -295.16,2258 129.16,2258 266.19,2395.03 266.19,2802
B15_P_L2: "RGB TFTLCD?.5" U3.25 | length 1838.1
  Top Layer w6.16: U3.25@-95.46,1608.78 -194.78,1608.78 -313,1727 -313,2212.32 -281.32,2244 143,2244 285.87,2386.87 285.87,2802
B15_P_L3: R41.1 SW1.2 U3.26 | length 1748.1
  Top Layer w6.16: v1(48.68,1610.6) 49.6,1609.69 94.56,1609.69 U3.26@95.47,1608.78
  Bottom Layer w6.16: R41.1@5,3019 6.51,3019 23.65,3001.86 23.65,3000.35 54,2970 54,2793 205.68,2641.31 205.68,2306.69 39,2140 -3.6,2140 -93,2050.6 -93,1751 47.4,1610.6 v1(48.68,1610.6)
  other v1: 5.43,3017.56
B15_P_L4: "RGB TFTLCD?.8" U3.31 | length 1754.9
  Top Layer w6.16: U3.31@-95.47,1667.83 -96.45,1668.8 -183.8,1668.8 -272,1757 -272,2160.16 -228.16,2204 183,2204 344.93,2365.93 344.93,2802
B15_P_L5: "RGB TFTLCD?.40" C42.1 U3.28 | length 1802.6
  Top Layer w5.61: U3.28@104.91,1628.84 459.09,1628.84 974.85,2144.59 974.85,2802
  Top Layer w6.16: 974.85,2802 1008.46,2802 1013.8,2796.65 1015.77,2796.65 1027.46,2784.97 C42.1@1027.46,2783
B15_P_L6: "RGB TFTLCD?.9" U3.33 | length 1728.1
  Top Layer w6.16: U3.33@-95.46,1687.52 -176.52,1687.52 -258,1769 -258,2146.32 -214.32,2190 197,2190 364.61,2357.61 364.61,2802
B15_P_L7: "RGB TFTLCD?.19" U3.51 | length 1517.9
  Top Layer w5.61: 561.46,2749.97 561.46,2802
  Top Layer w6.16: U3.51@-95.46,1864.68 -132.68,1864.68 -148,1880 -148,2017 -73.69,2091.31 341.31,2091.31 561.46,2311.46 561.46,2749.97
B15_P_L8: "RGB TFTLCD?.32" U3.44 | length 1480.1
  Top Layer w5.61: U3.44@104.91,1786.32 393.86,1786.32 817.37,2209.82 817.37,2802
B15_P_L9: "RGB TFTLCD?.21" U3.53 | length 1505
  Top Layer w5.61: 600.84,2749.97 600.84,2802
  Top Layer w6.16: U3.53@-95.46,1884.37 -127.37,1884.37 -135.34,1892.34 -135.34,2010.66 -64.85,2081.15 357.15,2081.15 600.84,2324.84 600.84,2749.97
B15_P_L10: "RGB TFTLCD?.16" U3.45 | length 1588.2
  Top Layer w6.16: U3.45@-95.46,1805.63 -98.54,1808.71 -150.71,1808.71 -183,1841 -183,2056.64 -117.28,2122.36 294.36,2122.36 502.41,2330.41 502.41,2802
B15_P_L11: "RGB TFTLCD?.27" U3.52 | length 1335.1
  Top Layer w5.61: U3.52@95.47,1864.68 95.89,1864.26 332.62,1864.26 718.94,2250.59 718.94,2802
B15_P_L12: "RGB TFTLCD?.28" U3.50 | length 1367.7
  Top Layer w5.61: U3.50@95.47,1845 95.89,1844.57 340.77,1844.57 738.63,2242.44 738.63,2802
B15_P_L13: "RGB TFTLCD?.26" U3.54 | length 1302.5
  Top Layer w5.61: 170,1883.94 324.46,1883.94 699.26,2258.74 699.26,2802
  Top Layer w6.16: U3.54@95.47,1884.37 169.58,1884.37 170,1883.94
B15_P_L14: "RGB TFTLCD?.24" U3.58 | length 1237.2
  Top Layer w5.61: 180,1923.31 308.15,1923.31 659.89,2275.05 659.89,2802
  Top Layer w6.16: U3.58@95.47,1923.74 179.58,1923.74 180,1923.31
B15_P_L15: JP2.7 U2.53 | length 2085.4
  Top Layer w6.16: U2.53@1664.54,1884.37 1706.02,1884.37 1726.17,1904.52 v1(1727,1904.52) ; v1(2695.34,2335.66) 2883.07,2523.38 JP2.7@2883.07,2536
  Bottom Layer w6.16: v1(1727,1904.52) 1727.83,1904.52 2005.34,1627 2600.69,1627 2633,1659.31 2633,2273.31 v1(2695.34,2335.66)
B15_P_L16: JP2.14 U2.40 | length 1913.2
  Top Layer w6.16: U2.40@1855.47,1746.57 1920.57,1746.57 1922.03,1748.03 1922.03,1753.56 v1(1924.24,1755.76)
  Bottom Layer w6.16: v1(1924.24,1755.76) 1924.24,1752.64 2018.88,1658 2562,1658 2596,1692 2596,2289.53 2681.05,2374.58 2899.05,2374.58 2921.65,2351.98 2921.65,2297.42 JP2.14@2983.07,2236
B15_P_L17: JP2.10 U2.44 | length 1669.5
  Top Layer w6.16: U2.44@1855.47,1785.94 1858.55,1789.02 1908.7,1789.02 1938,1818.32 1938,2099.02 1995.98,2157 2028,2157 v1(2029,2156) ; v1(2489,2156) 2848.52,2156 2869.62,2177.1 2907.47,2177.1 2944.49,2214.13 2944.49,2397.42 JP2.10@2983.07,2436
  Bottom Layer w6.16: v1(2029,2156) v1(2489,2156)
B15_P_L18: JP2.11 U2.49 | length 2000.4
  Top Layer w6.16: U2.49@1664.54,1845 1710.05,1845 1726.17,1861.12 v1(1727,1861.12) ; v1(2726.03,2304.97) 2757.07,2336 JP2.11@2883.07,2336
  Bottom Layer w6.16: v1(1727,1861.12) 1727.83,1861.12 1991.94,1597 2632.07,1597 2667,1631.93 2667,2245.93 v1(2726.03,2304.97)
B15_P_L19: R43.1 SW3.2 U3.22 | length 1955.7
  Top Layer w6.16: v1@44.34,1569.43 U3.22@95.44,1569.43
  Bottom Layer w6.16: R43.1@-244.49,3021 -208,2984.51 -208,2860 -162,2814 -58,2814 166.32,2589.69 166.32,2306.69 39,2179.37 -3.6,2179.37 -132.37,2050.6 -132.37,1748.16 23.56,1592.23 23.56,1590.21 v1(44.31,1569.46)
  other v1: -244.48,3027.99
B15_P_L20: R45.1 SW5.2 U3.2 | length 1944.6
  Top Layer w6.16: v1(-7.71,1570.29) -6.29,1570.29 15.91,1548.09 15.91,1422.09 65.44,1372.56 U3.2@95.47,1372.56
  Bottom Layer w6.16: R45.1@-239,2766 -233,2760 -217,2760 -190.5,2733.5 -190.5,2610.5 -136,2556 56,2556 124,2488 124,2306.69 39,2221.69 -3.6,2221.69 -174.68,2050.6 -174.68,1737.26 v1(-7.71,1570.29)
  other v1: -257.57,2777.56
B15_P_L21: "RGB TFTLCD?.14" U3.41 | length 1638.6
  Top Layer w6.16: U3.41@-95.46,1766.26 -98.54,1769.34 -161.34,1769.34 -208,1816 -208,2087.32 -152.64,2142.68 259.68,2142.68 463.04,2346.04 463.04,2802
B15_P_L22: "RGB TFTLCD?.38" U3.32 | length 1675.8
  Top Layer w5.61: U3.32@104.91,1668.2 442.79,1668.2 935.48,2160.9 935.48,2802
B15_P_L23: "RGB TFTLCD?.15" U3.43 | length 1615.1
  Top Layer w6.16: U3.43@-95.46,1785.94 -98.54,1789.02 -157.02,1789.02 -195,1827 -195,2072.48 -134.96,2132.52 279.52,2132.52 482.72,2335.72 482.72,2802
B15_P_L24: "RGB TFTLCD?.31" U3.46 | length 1447.5
  Top Layer w5.61: U3.46@104.91,1806 385.71,1806 797.69,2217.97 797.69,2802
B16_IO0: FPC1.37 U4.6 | length 205.6
  Top Layer w6.16: U4.6@95.47,453.93 v1(200.93,453.93)
  Bottom Layer w6.16: FPC1.37@101,454.15 101.11,454.04 200.82,454.04 v1(200.93,453.93) v1@201,454
B16_IO25: R52.2 U3.15 | length 1011.9
  Top Layer w6.16: v1(-270.66,1547.34) -233.67,1510.35 U3.15@-95.47,1510.35
  Bottom Layer w6.16: v1(-270.66,1547.34) -272.27,1548.96 -272.27,2159.34 -150,2281.61 R52.2@-150,2317.46
B16_N_L1: FPC1.35 U4.10 | length 205.5
  Top Layer w6.16: U4.10@95.47,493.3 v1(200.93,493.3)
  Bottom Layer w6.16: FPC1.35@101,493.52 101.11,493.41 200.82,493.41 v1(200.93,493.3)
B16_N_L2: FPC1.27 U4.26 | length 205.5
  Top Layer w6.16: U4.26@95.47,650.78 v1(200.93,650.78)
  Bottom Layer w6.16: FPC1.27@101,651 101.11,650.89 200.82,650.89 v1(200.93,650.78)
B16_N_L3: FPC1.21 U4.38 | length 205.5
  Top Layer w6.16: U4.38@95.47,768.89 v1(200.93,768.89)
  Bottom Layer w6.16: FPC1.21@101,769.11 101.11,769 200.82,769 v1(200.93,768.89)
B16_N_L4: FPC1.33 U4.14 | length 205.5
  Top Layer w6.16: U4.14@95.47,532.67 v1(200.93,532.67)
  Bottom Layer w6.16: FPC1.33@101,532.89 101.11,532.78 200.82,532.78 v1(200.93,532.67)